# EAGLE board Eency_v01 (EAGLE 6.5.0)
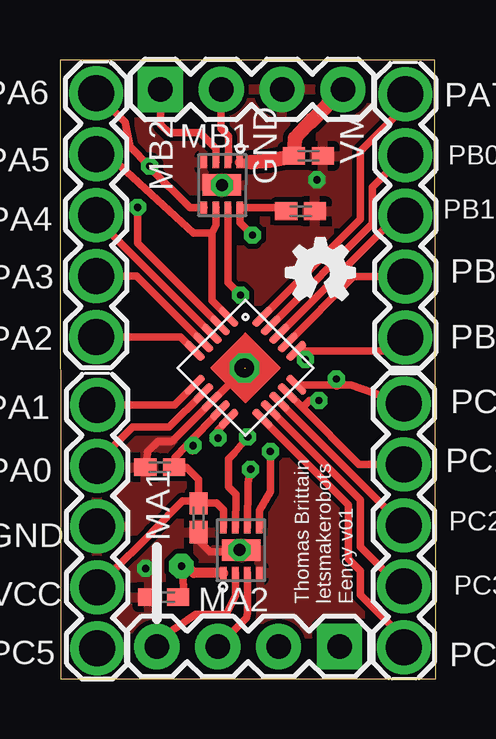
[diagram p0: board, top side]
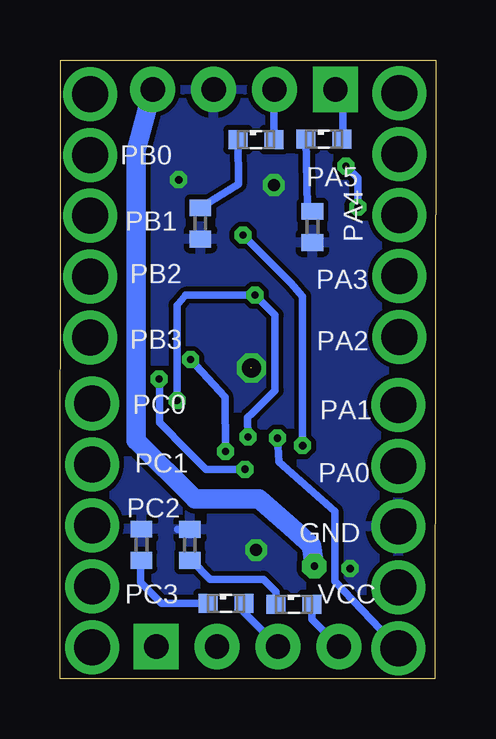
[diagram p1: board, bottom side, seen from below]

Size 15.68 x 25.81 mm. Coordinates in mm from the lower left corner, seen from the top.
Outline: 0.04,0 15.68,0 15.64,25.81 0,25.81 0.04,0
Copper layers (1*16): Top 0.035mm / dielectric 1.5mm / Bottom 0.035mm
Design rules "default *": minimum track width 10mil, minimum drill 24mil, track to track 8mil, track to pad 8mil, pad to pad 8mil, via to via 8mil, smd to smd 8mil, copper to edge 40mil, drill to drill 8mil, minimum pad ring 10mil, minimum via ring 8mil, stop-mask expansion 4mil, vias tented up to drill 0.3mm, thermal gap 10mil

## Footprints (pad centres in the part's own frame; a part is rotated, then mirrored left to right if it is on the bottom)
C0402K = smd 0.925 x 0.74: 1 -0.6,0; 2 0.6,0
1X04 = drill 1.016 pad 1.88 square: 1 0,0 | drill 1.016 pad 1.88: 2 2.54,0; 3 5.08,0; 4 7.62,0
SML0603 = smd 0.8 x 0.8: A 0.75,0; C -0.75,0
R0402 = smd 0.7 x 0.9: 1 -0.65,0; 2 0.65,0
MLF20/ATTINY13 = smd 1 x 0.3: P$1 -2,1; P$2 -2,0.5; P$3 -2,0; P$4 -2,-0.5; P$5 -2,-1; P$11 2,-1; P$12 2,-0.5; P$13 2,0; P$14 2,0.5; P$15 2,1 | smd 0.3 x 1: P$6 -1,-2; P$7 -0.5,-2; P$8 0,-2; P$9 0.5,-2; P$10 1,-2; P$16 1,2; P$17 0.5,2; P$18 0,2; P$19 -0.5,2; P$20 -1,2 | smd 0.813 x 0.406: P$21 0,0
1X5_SHORT_ROUND = drill 1.5 pad 2.2: 1 1.27,-1.52; 2 3.81,-1.52; 3 6.35,-1.52; 4 8.89,-1.52; 5 11.43,-1.52
WSON-8 = smd 0.5 x 0.28: GND 0.32,-2.02; IN1 2.22,-1.52; IN2 2.22,-2.02; N_SLEEP 2.22,-1.02; OUT1 0.32,-1.02; OUT2 0.32,-1.52; VCC 2.22,-0.52; VM 0.32,-0.52 | smd 0.9 x 1.6: GND_P 1.27,-1.27

## Placement (x,y rotation side)
C1  [C0402K]  4.17,8.83 180 top
C2  [C0402K]  5.78,6.72 270 top
C3  [C0402K]  4.33,3.41 180 top
C4  [C0402K]  10.04,19.5 0 top
C5  [C0402K]  10.36,21.8 0 top
JP1  [1X04]  4.19,24.58 0 top
JP2  [1X04]  11.66,1.35 180 top
LED1  [SML0603]  4.67,22.51 0 bottom
LED2  [SML0603]  7.5,22.49 0 bottom
LED3  [SML0603]  5.92,3.11 0 bottom
LED4  [SML0603]  8.75,3.15 0 bottom
R1  [R0402]  12.27,5.6 90 bottom
R2  [R0402]  10.26,5.59 90 bottom
R3  [R0402]  9.82,18.99 90 bottom
R4  [R0402]  5.14,18.85 90 bottom
U$1  ATTINY1634  [MLF20/ATTINY13]  7.74,12.97 315 top
U$2  1X5_SHORT_ROUND  [1X5_SHORT_ROUND]  0.04,0 90 top
U$3  1X5_SHORT_ROUND  [1X5_SHORT_ROUND]  12.89,12.96 90 top
U$4  1X5_SHORT_ROUND  [1X5_SHORT_ROUND]  -0.01,12.99 90 top
U$5  1X5_SHORT_ROUND  [1X5_SHORT_ROUND]  15.86,12.75 270 top
U$7  [OSHW_FILLX100_NOTEXT]  9.46,15.82 0 top
U$8  DRV8837  [WSON-8]  6.29,4.09 90 top
U$9  DRV8837  [WSON-8]  8.02,21.86 270 top

## Library data of the parts
C1-C5 R1-R4 = resistor
JP1 JP2 = SparkFun
LED1-LED4 = led
U$1 = avr-5
U$2-U$5 = Random parts(01-14-14)
U$7 = ohw-logo
U$8 U$9 = tinycircuits

## Nets
GND: C1.2 C2.2 C3.2 C4.2 C5.2 JP1.3 R1.2 R2.2 R3.1 R4.1 U$1.P$8 U$1.P$21 U$2.3 U$8.GND U$8.GND_P U$9.GND U$9.GND_P
MA_OUT1: JP2.4 LED3.A U$8.OUT1
MA_OUT2: JP2.3 LED4.A U$8.OUT2
MB_OUT1: JP1.2 LED2.A U$9.OUT1
MB_OUT2: JP1.1 LED1.A U$9.OUT2
N$1: U$1.P$18 U$3.3
N$2: U$1.P$19 U$3.4
N$3: LED3.C R2.1
N$4: LED4.C R1.1
N$5: LED1.C R4.2
N$6: LED2.C R3.2
PA0: U$1.P$7 U$2.4
PA1: U$1.P$6 U$2.5
PA2: U$1.P$5 U$4.1
PA3: U$1.P$4 U$4.2
PA4: U$1.P$3 U$4.3
PA5: U$1.P$2 U$4.5 U$9.IN2
PA6: U$1.P$1 U$4.4 U$9.IN1
PA7: U$1.P$20 U$3.5
PB2: U$1.P$17 U$3.2
PB3: U$1.P$16 U$3.1 U$8.IN2
PC0: U$1.P$15 U$5.1 U$8.IN1
PC1: U$1.P$14 U$5.2 U$8.N_SLEEP U$9.N_SLEEP
PC2-SCK: U$1.P$13 U$5.3
PC3-RES: U$1.P$12 U$5.4
PC4: U$1.P$11 U$5.5
PC5: U$1.P$10 U$2.1
VCC: C1.1 C2.1 C4.1 U$1.P$9 U$2.2 U$8.VCC U$9.VCC
VM: C3.1 C5.1 JP1.4 U$8.VM U$9.VM

## Tracks (layer width: path | path; a pad name or v marks a point on that pad's centre or on a via)
GND  (via drill 0.3, 0.5, 0.8)  (1 unrouted)
  Top 0.305: C1.2 3.65,9.41 3.65,9.47 4.09,9.91 4.65,9.91 4.67,9.93 4.7,9.93 U$1.P$8 U$1.P$21 | C2.2 5.78,5.78 6.27,5.3 7.5,5.3 U$8.GND_P
  Bottom 0.305: R2.2 10.77,6.24
  other vias: 7.69,12.97 7.49,5.37 10.72,20.81 3.57,4.6 6.76,20.59
  pour Bottom: 0.04,0 0.04,26 15.54,26 15.54,0
  pour Top: 0.04,0 0.04,26 15.54,26 15.54,0
MA_OUT1
  Top 0.305: JP2.4 4.04,1.58 5.66,2.7 6.93,2.7 7.32,3.47 U$8.OUT1
  Bottom 0.305: LED3.A 5.17,2.47 JP2.4
MA_OUT2
  Top 0.305: U$8.OUT2 7.81,2.75 7.77,2.56 7.63,2.4 JP2.3
  Bottom 0.305: LED4.A 8,2.77 JP2.3
MB_OUT1
  Top 0.305: JP1.2 6.73,22.94 7.03,22.64 7.03,21.57 U$9.OUT1
  Bottom 0.305: LED2.A 6.75,24.56 JP1.2
MB_OUT2
  Top 0.305: U$9.OUT2 6.5,22.11 5.85,22.77 4.55,22.77 4.2,23.11 4.2,24.57 JP1.1
  Bottom 0.305: LED1.A 3.86,23 3.88,23.86 4.21,24.55 JP1.1
N$1
  Top 0.305: U$3.3 14.08,19.31 U$1.P$18
N$2
  Top 0.305: U$3.4 14.39,21.85 13.04,20.5 13.04,18.98 U$1.P$19
N$3
  Bottom 0.305: LED3.C 6.67,3.63 7.2,4.16 9.41,4.16 10.19,4.94 R2.1
N$4
  Bottom 0.305: LED4.C 11.44,3.15 12.3,4.02 12.3,4.91 R1.1
N$5
  Bottom 0.305: R4.2 5.35,19.7 LED1.C
N$6
  Bottom 0.305: LED2.C 8.24,20.63 R3.2
PA0
  Top 0.305: U$2.4 1.56,9.02 3.04,10.5 4.56,10.5 U$1.P$7
PA1
  Top 0.305: U$2.5 4.78,11.43 U$1.P$6
PA2
  Top 0.305: U$4.1 5.03,14.26 U$1.P$5
PA3
  Top 0.305: U$4.2 3.2,16.8 U$1.P$4
PA4
  Top 0.305: U$4.3 1.51,19.19 U$1.P$3
PA5  (via drill 0.3)  (1 unrouted)
  Top 0.305: U$9.IN2 5.42,19.64 3.72,21.34 3.72,21.39 2.92,22.18 2.72,23.21 U$4.5 | U$1.P$2 3.24,18.18 v3.24,19.66
  Bottom 0.305: v3.24,19.66 3.24,20.88 v3.75,21.38
PA6
  Top 0.305: U$4.4 2.53,21.38 5.58,18.59 5.73,18.58 6.35,18.58 | 6.35,18.58 6.51,18.94 6.51,19.07 6.51,19.6 U$9.IN1 | 6.35,18.58 6.35,15.77 U$1.P$1
PA7
  Top 0.305: U$3.5 14.41,23.87 12.54,22 12.54,19.18 U$1.P$20
PB2
  Top 0.305: U$3.2 12.24,16.77 U$1.P$17
PB3  (via drill 0.3)
  Top 0.305: U$3.1 13.85,13.68 U$1.P$16 10.04,13.5 v10.23,13.32 | v8.77,9.49 8.78,7.81 8.33,7.03 U$8.IN2
  Bottom 0.305: v10.23,13.32 8.79,11.76 v8.77,9.49
PC0  (via drill 0.3)
  Top 0.305: U$5.1 12.14,12.27 11.54,12.26 U$1.P$15 | U$8.IN1 7.84,8.18 v7.96,8.74
  Top 0.406: v11.54,12.5 | v11.54,12.5 11.54,12.26
  Bottom 0.305: 10.32,9.49 10.33,9.49 | 10.33,9.49 11.53,10.68 v11.53,12.49 v11.54,12.5 | v7.96,8.74 9.58,8.74 10.33,9.49
PC1  (via drill 0.3)
  Top 0.305: U$8.N_SLEEP 7.34,7.7 7.03,8.01 7.03,9.17 7.26,9.4 7.26,9.41 v7.83,10.09 | U$5.2 12.47,8.94 10.11,11.31 | 10.11,11.31 U$1.P$14 | U$9.N_SLEEP 7,16.53 v7.54,16 | v10.8,11.61 10.4,11.61 10.11,11.31
  Bottom 0.305: v10.8,11.61 10.79,11.74 10.79,15.58 10.43,16 v7.54,16 6.7,15.16 6.7,12.03 7.64,11.09 7.84,10.89 v7.83,10.09
PC2-SCK
  Top 0.305: U$5.3 14.31,6.4 U$1.P$13
PC3-RES
  Top 0.305: U$5.4 14.17,3.86 12.54,5.5 12.54,7.46 U$1.P$12
PC4
  Top 0.305: U$5.5 14.34,1.69 12.54,3.5 12.54,4.5 12.04,5 12.04,7.26 U$1.P$11
PC5  (via drill 0.3)
  Top 0.305: U$1.P$10 6.59,10.38 v6.6,10.04
  Bottom 0.305: v6.6,10.04 6.54,9.04 4.22,6.99 4.2,4.07 U$2.1
VCC  (via drill 0.3)
  Top 0.305: C4.1 9.29,19.64 U$9.VCC 7.5,19.03 v8.04,18.5 | U$2.2 1.99,3.81 1.99,4.27 3.84,6.11 3.84,6.14 5.11,7.41 5.69,7.41 C2.1 | 5.81,7.39 C2.1 | 5.29,9.73 4.81,9.23 C1.1 5.29,8.83 5.79,8.32 5.79,7.33 C2.1 | 5.29,9.73 U$1.P$9 | U$8.VCC 6.81,7.06 6.53,7.34 5.8,7.34 C2.1 | v5.55,9.73 5.52,9.5 5.29,9.73
  Bottom 0.305: v8.04,18.5 6.04,16.5 5.56,15.95 v5.55,9.73
VM  (via drill 0.3 pad 1.02)
  Top 0.305: 10.5,23.31 10.44,23.21 | v5.07,4.7 5.18,3.66 C3.1
  Top 0.406: U$9.VM 7.54,21.5 7.92,21.5 7.97,21.55 | U$8.VM 5.58,4.41 5.44,4.55 v5.07,4.7
  Top 0.605: 7.97,21.55 8.76,21.61 C5.1 9.81,22.55 10.5,23.31 | 10.44,23.21 JP1.4
  Bottom 0.813: JP1.4 12.49,22.03 12.49,9.95 10.04,7.5 7.37,7.5 6.03,6.33 5.19,5.57 v5.07,4.7

## Text on the board
_tsilk: PA6 | PA7 | MB2 | MB1 | PA5 | GND | VM | PB0 | PA4 | PB1 | PB2 | PA3 | PA2 | PB3 | PA1 | PC0 | PC1 | PA0 | MA1 | PC2 | GND | MA2 | PC3 | VCC | Thomas Brittain / letsmakerobots / Eency v01 | PC5 | PC4
_bsilk: PA5 | PB0 | PA4 | PB1 | PB2 | PA3 | PA2 | PB3 | PA1 | PC0 | PC1 | PA0 | GND | PC2 | VCC | PC3